# Altium PCB Teensy_Interposer_Board.PcbDoc
Units mm, origin at the board's own origin, x right, y up, seen from the top; angles counter-clockwise.
Board outline 26.3 x 62 mm, 2 copper layers (Top Layer, Bottom Layer); 4 components, 9 nets, 99 pads, 1 vias.
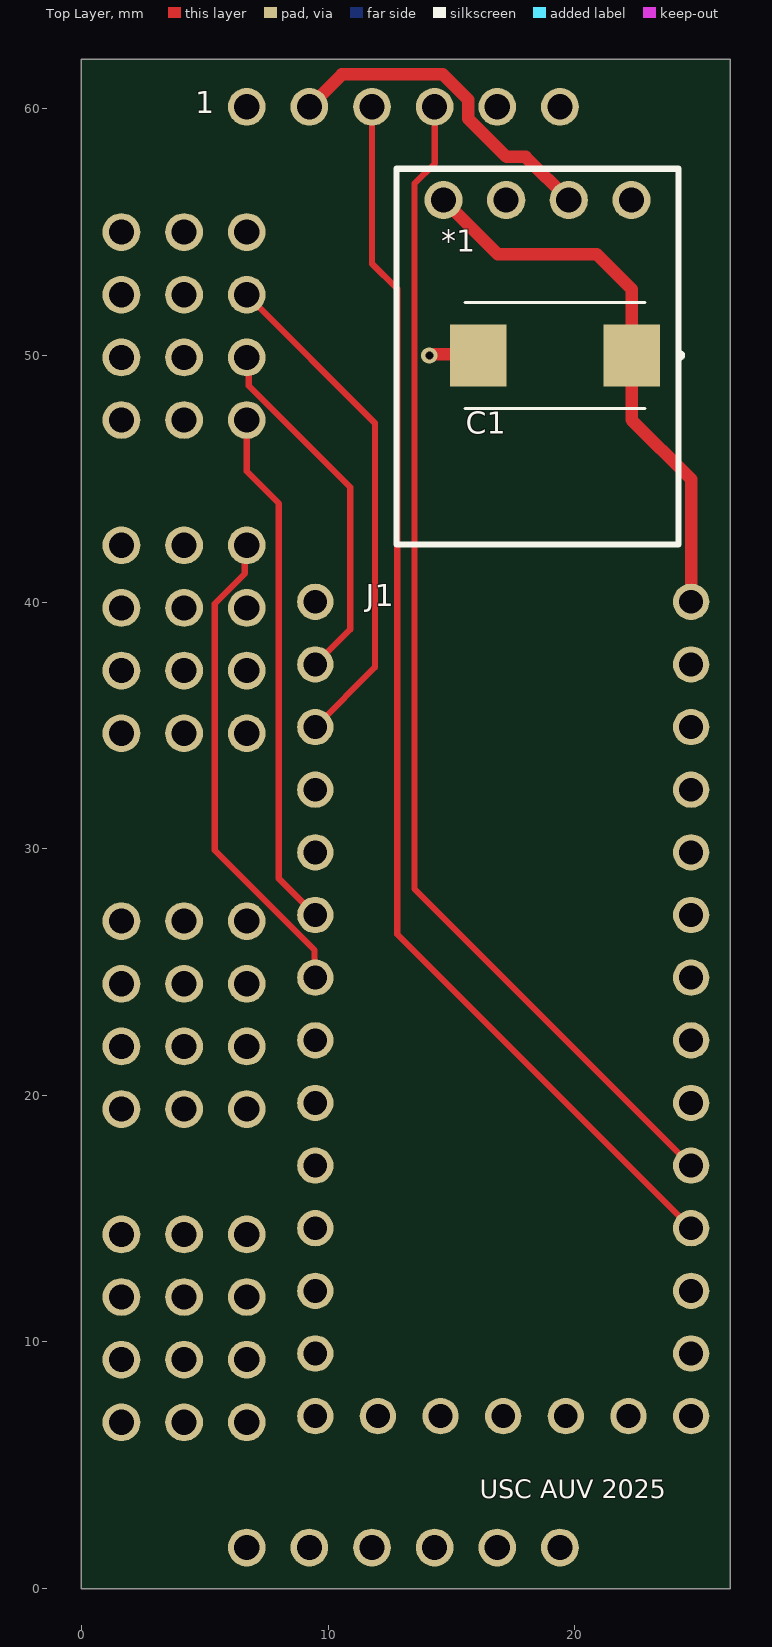
[diagram p0: Top Layer view]
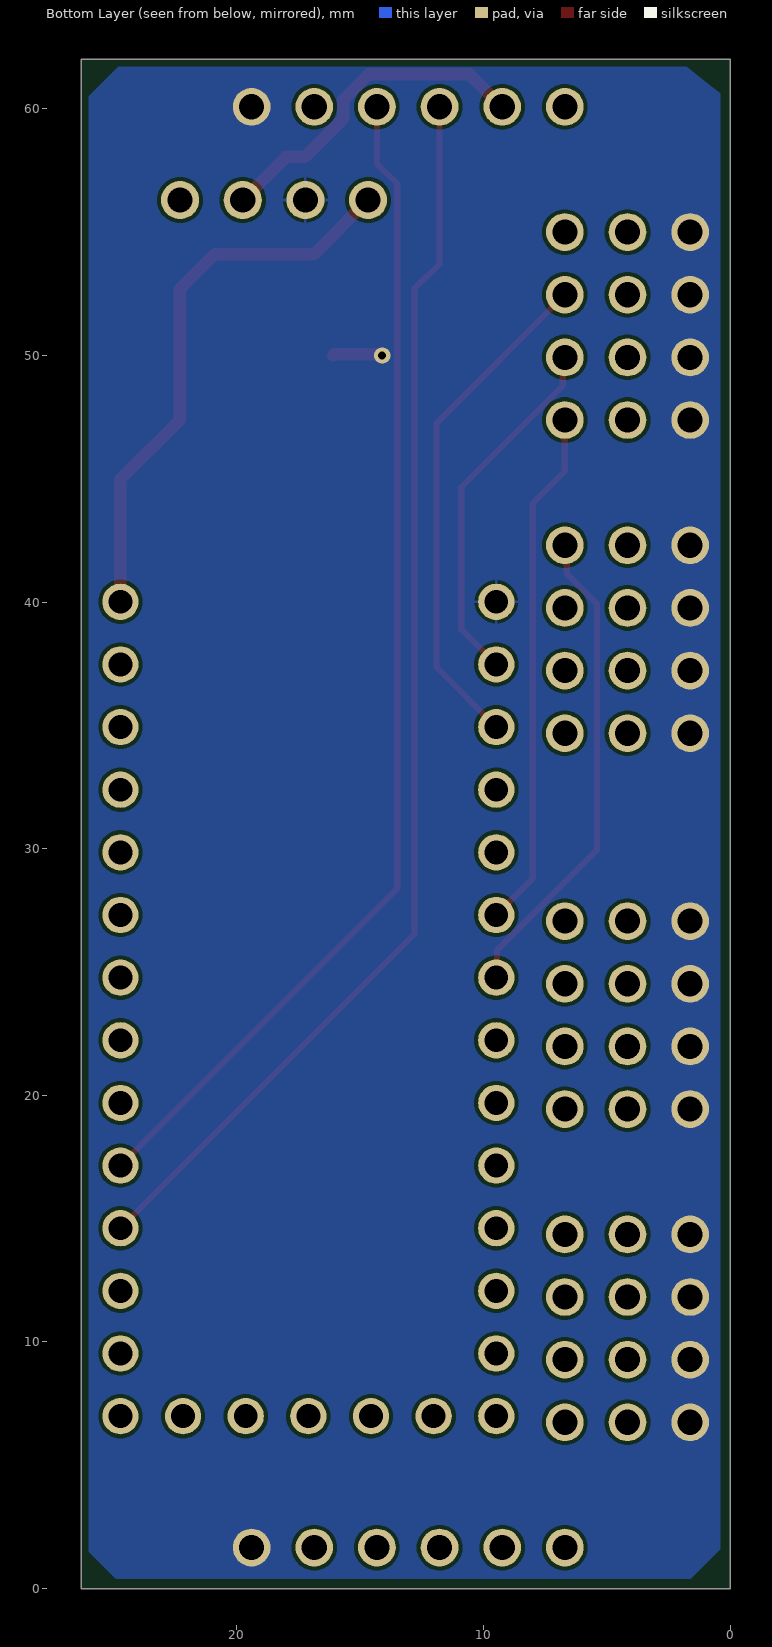
[diagram p1: Bottom Layer view, seen from below]

## Layer stack, top to bottom
Top Solder: solder mask 0.0102, Solder Resist, Dk 3.5
Top Layer: signal copper 0.0356
Dielectric 1: dielectric 0.32, FR-4, Dk 4.8
Bottom Layer: signal copper 0.0356
Bottom Solder: solder mask 0.0102, Solder Resist, Dk 3.5

## Board outline
0,0 26.3,0 26.3,62 0,62

## Design rules (kind name [scope] priority, off if disabled: settings)
BoardOutlineClearance [All] p1: gap=0.2 ignorepadtopadclearanceinfootprint=FALSE
Clearance [All] p1: gap=0.15 ignorepadtopadclearanceinfootprint=TRUE
ComponentClearance [All] p1: gap=0.127 collisioncheckmode=3 verticalgap=0.127 showdistances=TRUE
DiffPairsRouting [All] p1: maxlimit=0.254 minlimit=0.127 mostfreqgap=0.127 toplayer_minwidth=0.127 toplayer_maxwidth=25.4 toplayer_prefwidth=0.127 bottomlayer_minwidth=0.127 bottomlayer_maxwidth=25.4 bottomlayer_prefwidth=0.127 maxuncoupledlength=12.7
Height [All] p1: minheight=0 maxheight=1816.048 prefheight=12.7
HoleSize [All] p1: absolutevalues=TRUE maxlimit=6.3 minlimit=0.3 maxpercent=80.000 minpercent=20.000
HoleToHoleClearance [All] p1: gap=0.254 allowstackedmicrovias=FALSE
MinimumAnnularRing [All] p1: minimumring=0.152
MinimumSolderMaskSliver [All] p1: minsoldermaskwidth=0.152
PlaneClearance [All] p1: clearance=0.127
PlaneConnect PlaneConnectPowerPads [InPadClass('PowerPads')] p1: planeconnectstyle=Direct reliefexpansion=0.508 reliefentries=4 reliefconductorwidth=0.254 reliefairgap=0.254
PlaneConnect [All] p2: pad.planeconnectstyle=Relief pad.reliefexpansion=0.3 pad.reliefentries=4 pad.reliefconductorwidth=0.127 pad.reliefairgap=0.127 via.planeconnectstyle=Direct via.reliefexpansion=0.3 via.reliefentries=4 via.reliefconductorwidth=0.127 via.reliefairgap=0.127
PolygonConnect PolygonConnectPowerPads [All vs (InPadClass('PowerPads'))] p1: connectstyle=Direct reliefconductorwidth=0.254 reliefentries=4 polygonreliefangle="90 Angle" airgapwidth=0.254
PolygonConnect [All] p2: thpad.connectstyle=Relief thpad.reliefconductorwidth=0.127 thpad.reliefentries=4 thpad.polygonreliefangle="90 Angle" thpad.airgapwidth=0.127 smdpad.connectstyle=Relief smdpad.reliefconductorwidth=0.127 smdpad.reliefentries=4 smdpad.polygonreliefangle="90 Angle" smdpad.airgapwidth=0.127 via.connectstyle=Direct via.reliefconductorwidth=0.127 via.reliefentries=4 via.polygonreliefangle="90 Angle" via.airgapwidth=0.127
RoutingVias [All] p1: holewidth=0.3 width=0.6 viastyle="Through Hole" minholewidth=0.3 minwidth=0.6 maxholewidth=0.6 maxwidth=6.6
SilkToSilkClearance [All] p1: silktosilkclearance=0.127
SilkToSolderMaskClearance [IsPad] p1: minsilkscreentomaskgap=0.127 clearancetoexposedcopper=TRUE
SolderMaskExpansion [All] p1: expansion=0.051 istentingtop=FALSE
SupplyNets "Schematic Supply Nets" [InNet('GND')] p1: voltage=0.000
UnRoutedNet [All] p1: checkbadconnections=TRUE
Width Width_10mil [All] p1: maxlimit=25.4 minlimit=0.254 preferedwidth=0.254 minimp=50.000000 maximp=50.000000 favimp=50.000000
Width Width_6mil [All] p2: maxlimit=25.4 minlimit=0.152 preferedwidth=0.152 minimp=50.000000 maximp=50.000000 favimp=50.000000
Width Power_20mil [All] p3: maxlimit=25.4 minlimit=0.508 preferedwidth=0.508 minimp=50.000000 maximp=50.000000 favimp=50.000000
Width Power_12mil [All] p4: maxlimit=25.4 minlimit=0.305 preferedwidth=0.305 minimp=50.000000 maximp=50.000000 favimp=50.000000
Width Width_5mil [All] p5: maxlimit=25.4 minlimit=0.127 preferedwidth=0.127 minimp=50.000000 maximp=50.000000 favimp=50.000000
19 further rules are at their usual default settings.

## Components (designator, comment, footprint, x,y, rotation, side; value= is the part's Value field where it differs from the comment)
1 "ADAFRUIT_SERVO_DRIVER_PLACE" ADAFRUIT_SERVO_DRIVER_PLACE 6.7,55 r270 top
*1 "U1V11F5" U1V11F5-Footprint-1 19.76,56.3 r180 top
C1 "TPSD106K025R0500" CAPPM7343X310N 19.2,50 r180 top value=10µF
J1 "TEENSY_4.0" TEENSY_4.0 17.1,23.5 r270 top

## Footprints (in the part's own frame and the unit in brackets; to place one, negate y for a bottom-side part, rotate by r counter-clockwise, add the part's x,y. Pads: shape width x height; smd on the part's side, far side on the other; paste and mask are expansions set on the pad)
ADAFRUIT_SERVO_DRIVER_PLACE [mm]
  round 1.53 hole 1.02: 0+(0,-2.54) 0G(0,-5.08) 0S(0,0) 1+(2.54,-2.54) 1G(2.54,-5.08) 1S(2.54,0) 2+(5.08,-2.54) 2G(5.08,-5.08) 2S(5.08,0) 3+(7.62,-2.54) 3G(7.62,-5.08) 3S(7.62,0) 4+(12.7,-2.54) 4G(12.7,-5.08) 4S(12.7,0) 5+(15.24,-2.54) 5G(15.24,-5.08) 5S(15.24,0) 6+(17.78,-2.54) 6G(17.78,-5.08) 6S(17.78,0) 7+(20.32,-2.54) 7G(20.32,-5.08) 7S(20.32,0) 8+(27.94,-2.54) 8G(27.94,-5.08) 8S(27.94,0) 9+(30.48,-2.54) 9G(30.48,-5.08) 9S(30.48,0) 10+(33.02,-2.54) 10G(33.02,-5.08) 10S(33.02,0) 11+(35.56,-2.54) 11G(35.56,-5.08) 11S(35.56,0) 12+(40.64,-2.54) 12G(40.64,-5.08) 12S(40.64,0) 13+(43.18,-2.54) 13G(43.18,-5.08) 13S(43.18,0) 14+(45.72,-2.54) 14G(45.72,-5.08) 14S(45.72,0) 15+(48.26,-2.54) 15G(48.26,-5.08) 15S(48.26,0) GND(-5.08,12.7) GND2(53.34,12.7) OE(-5.08,10.16) OE2(53.34,10.16) SCL(-5.08,7.62) SCL2(53.34,7.62) SDA(-5.08,5.08) SDA2(53.34,5.08) V+(-5.08,0) V+1(53.34,0) VCC(-5.08,2.54) VCC2(53.34,2.54)
CAPPM7343X310N [mm]
  rect 2.3x2.52 smd: 1(-3.11,0) 2(3.11,0)
  silkscreen extent -5.18,-2.15 3.65,2.15
TEENSY_4.0 [mil]
  round 58 hole 38: 0/RX(-550,-300) 1/TX(-450,-300) 2(-350,-300) 3/CANTX(-250,-300) 3V3_LN(650,-100) 3V3_LO(-450,300) 4/CANRX(-150,-300) 5(-50,-300) 6(50,-300) 7(150,-300) 8(250,-300) 9/CS(350,-300) 10/CS(450,-300) 11/MOSI(550,-300) 12/MISO(650,-300) 13/SCK(650,300) 14/A0(550,300) 15/A1(450,300) 16/A2(350,300) 17/A3(250,300) 18/A4/SDA(150,300) 19/A5/SCL(50,300) 20/A6(-50,300) 21/A7(-150,300) 22/A8(-250,300) 23/A9(-350,300) GND(-650,-300) GND2(-550,300) GND3(650,0) ON/OFF(650,200) PROG(650,100) VBAT\(650,-200) VIN(-650,300)
  body extent -725,-350 703,350, height 172
U1V11F5-Footprint-1 [mm]
  round 1.55 hole 1.02: 1(-2.54,0) 2(0,0) 3(2.54,0) 4(5.08,0)
  silkscreen extent -4.45,-1.27 6.98,13.97

## Part data
1: library part CMP-012-000005-1, Component Type=Standard, Design Item ID=ADAFRUIT_SERVO_DRIVER_PLACE, DeviceSetName=ADAFRUIT_SERVO_DRIVER_PLACE, GateName_1=G$1, LibraryName=BackBottom+v1, Package=ADAFRUIT_SERVO_DRIVER_PLACE, Pin Count=26, Source=BackBottom+v1.SCHLIB, SymbolName_1=ADAFRUIT_SERVO_DRIVER_PLACE
*1: library part CMP-019-00052-4, "Pololu 5V Step-Up Voltage Regulator U1V11F5", Min Supply Voltage=500mV, Output Voltage=5V, Pins="Vin, Vout, GND, SHDN"
C1: library part CMP-001-00916-1, "Low ESR MnO2,10 uF,25 V", Case/Package=None, Check_prices=https://www.snapeda.com/parts/TPSD106K025R0500/AVX/view-part/?ref=eda, Component Type=Standard, Design Item ID=TPSD106K025R0500, MF=AVX, MP=TPSD106K025R0500, Pins=2, SnapEDA_Link=https://www.snapeda.com/parts/TPSD106K025R0500/AVX/view-part/?ref=snap, Source=TPSD106K025R0500.SchLib
J1: library part CMP-003-000002-4, "Teensy 4.0", Package=None, Check_prices=https://www.snapeda.com/parts/Teensy%204.0/PJRC/view-part/?ref=eda, Component Type=Standard, Design Item ID=TEENSY_4.0, MF=PJRC, MP="Teensy 4.0", Pin Count=33, SnapEDA_Link=https://www.snapeda.com/parts/Teensy%204.0/PJRC/view-part/?ref=snap, Source=TEENSY_4.0.SchLib

## Via types
v1: diameter 0.66, hole 0.33, Top Layer to Bottom Layer, 1 vias

## Nets (pads, with @x,y where several pads share a name; then routed paths per layer and width w, separated by ;. In a path a pad name is that pad's centre, name@x,y a point inside that pad or via, vN(x,y) a via of type N, cw(c..) or ccw(c..) an arc to the next point about the centre after c; other vN are vias at no path point)
3.3V: 1.VCC *1.2 | length 13.6
  Top Layer w0.508: 1.VCC 10.56,61.4 14.653,61.4 15.691,60.362 15.691,59.596 17.239,58.048 18.012,58.048 *1.2
5V: *1.4 C1.1 J1.VIN | length 22.8
  Top Layer w0.508: *1.4 16.88,54.1 20.9,54.1 22.31,52.69 C1.1 22.31,47.39 24.72,44.98 J1.VIN
GND: 1.0G 1.1G 1.2G 1.3G 1.4G 1.5G 1.6G 1.7G 1.8G 1.9G 1.10G 1.11G 1.12G 1.13G 1.14G 1.15G 1.GND 1.GND2 *1.3 C1.2 J1.GND | length 2
  Top Layer w0.508: v1(14.107,50) 14.141,50 14.186,50.045 16.045,50.045 C1.2
PWM1: 1.1S J1.1/TX | length 20.7
  Top Layer w0.254: 1.1S 11.9,47.26 11.9,37.35 J1.1/TX
PWM2: 1.2S J1.0/RX | length 14.8
  Top Layer w0.254: 1.2S 6.78,49.84 6.78,48.774 10.9,44.654 10.9,38.89 J1.0/RX
PWM3: 1.3S J1.4/CANRX | length 21.2
  Top Layer w0.254: 1.3S 6.7,45.3 8,44 8,28.79 J1.4/CANRX
PWM4: 1.4S J1.5 | length 19.8
  Top Layer w0.254: 1.4S 6.62,42.22 6.62,41.154 5.4,39.934 5.4,29.94 9.452,25.888 9.452,24.798 J1.5
SCL5: 1.SDA J1.16/A2 | length 50.8
  Top Layer w0.254: 1.SDA 11.78,53.72 12.8,52.7 12.8,26.53 J1.16/A2
SDA5: 1.SCL J1.17/A3 | length 47.9
  Top Layer w0.254: 1.SCL 14.32,57.777 13.5,56.957 13.5,28.37 J1.17/A3
pads on no net: 1.0+ 1.0S 1.1+ 1.2+ 1.3+ 1.4+ 1.5+ 1.5S 1.6+ 1.6S 1.7+ 1.7S 1.8+ 1.8S 1.9+ 1.9S 1.10+ 1.10S 1.11+ 1.11S 1.12+ 1.12S 1.13+ 1.13S 1.14+ 1.14S 1.15+ 1.15S 1.OE 1.OE2 1.SCL2 1.SDA2 1.V+ 1.V+1 1.VCC2 *1.1 J1.2 J1.3/CANTX J1.3V3_LN J1.3V3_LO J1.6 J1.7 J1.8 J1.9/CS J1.10/CS J1.11/MOSI J1.12/MISO J1.13/SCK J1.14/A0 J1.15/A1 J1.18/A4/SDA J1.19/A5/SCL J1.20/A6 J1.21/A7 J1.22/A8 J1.23/A9 J1.GND2 J1.GND3 J1.ON/OFF J1.PROG J1.VBAT\

## Polygon pours and split planes (outlines as drawn)
GND on Bottom Layer "GND_L02_P000" (solid, pour order 0): 1.75,61.7 1,61.1 0.4,60.62 0.4,1.6 1.6,0.4 24.9,0.4 26,1.5 26,60.5 24.8,61.7

## Silkscreen, mask and mechanical layers (free items; w line width, h text height)
Top Overlay:
  text "USC AUV 2025" at 16.154,3.654 h0.76